# Altium PCB Buck Converter.PcbDoc
Units mil, origin at the board's own origin, x right, y up, seen from the top; angles counter-clockwise.
Board outline 1155 x 335 mil, 2 copper layers (Top Layer, Bottom Layer); 9 components, 6 nets, 22 pads, 23 vias.
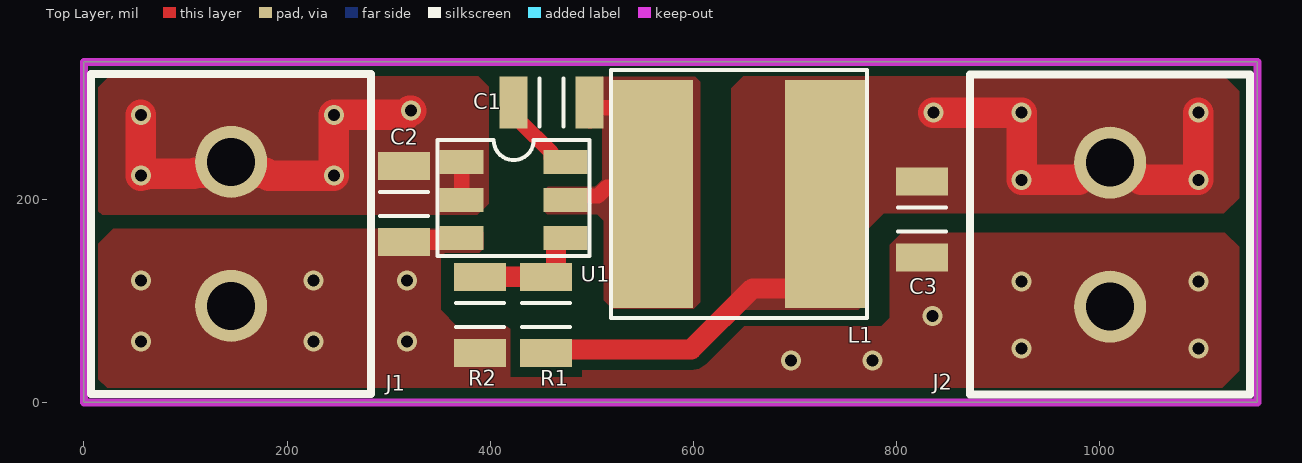
[diagram p0: Top Layer view]
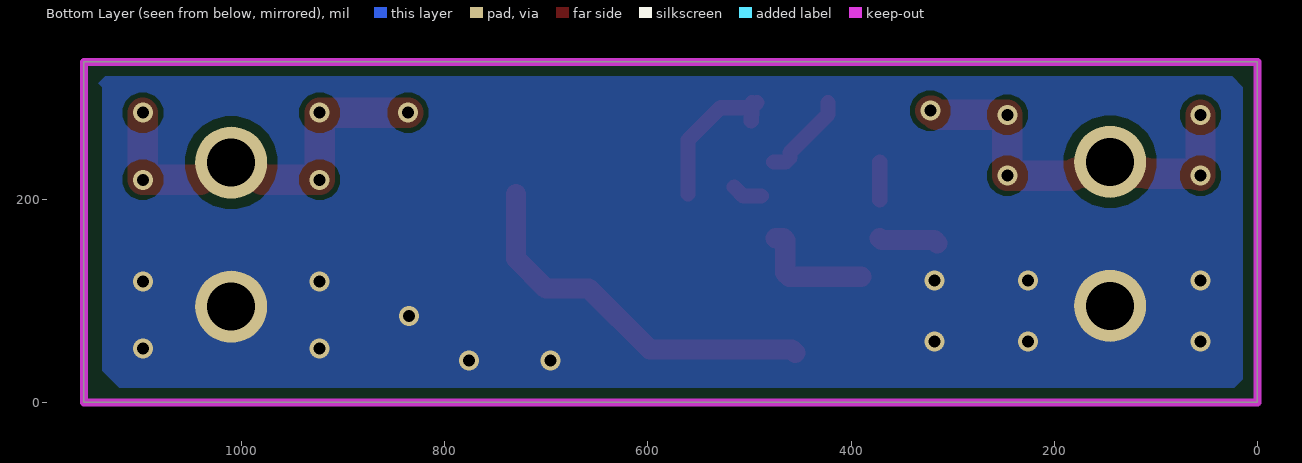
[diagram p1: Bottom Layer view, seen from below]
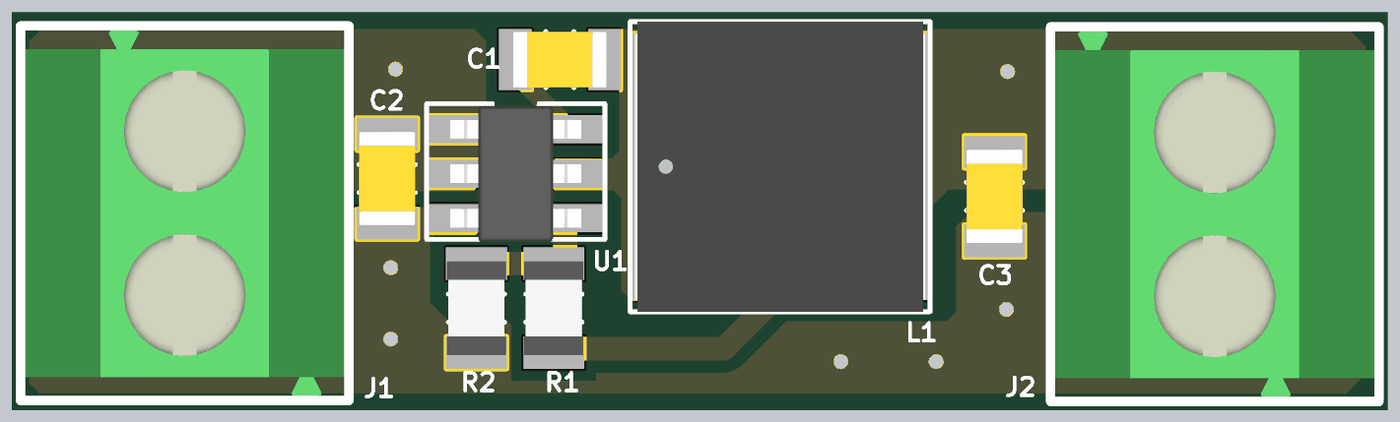
[diagram p2: 3D render of the assembled board from above, using the file's embedded part models]

## Layer stack, top to bottom
Top Solder: solder mask 0.4, Solder Resist, Dk 3.5
Top Layer: signal copper 1.4
Dielectric 1: dielectric 12.6, FR-4, Dk 4.8
Bottom Layer: signal copper 1.4
Bottom Solder: solder mask 0.4, Solder Resist, Dk 3.5

## Board outline
0,0 1155,0 1155,335 0,335

## Design rules (kind name [scope] priority, off if disabled: settings)
Clearance [All] p1: gap=10 ignorepadtopadclearanceinfootprint=FALSE except(0: Arc-Hole Track-Hole SMDPad-Hole THPad-Hole Via-Hole Fill-Hole Poly-Hole Region-Hole Text-Hole)
MinimumSolderMaskSliver [All] p1: minsoldermaskwidth=0
NetAntennae [All] p1: netantennaetolerance=1
PolygonConnect [All] p1: connectstyle=Relief reliefconductorwidth=10 reliefentries=4 polygonreliefangle="90 Angle" airgapwidth=10
RoutingVias [All] p1: holewidth=11.81 width=19.68 viastyle="Through Hole" minholewidth=9.84 minwidth=15.75 maxholewidth=19.68 maxwidth=39.37
SilkToSilkClearance [All] p1: silktosilkclearance=0
SilkToSolderMaskClearance [IsPad] p1: minsilkscreentomaskgap=0 clearancetoexposedcopper=TRUE
SolderMaskExpansion [All] p1: expansion=4 istentingtop=FALSE
Width [All] p1: maxlimit=500 minlimit=10 preferedwidth=10 minimp=50.000000 maximp=50.000000 favimp=50.000000
26 further rules are at their usual default settings.

## Components (designator, comment, footprint, x,y, rotation, side; value= is the part's Value field where it differs from the comment)
C1 "0.1uF/25V" "CAP 0805" 460,295 r180 top
C2 "2.2uF/50V" "CAP 0805" 315,195 r90 top
C3 "10uF/10V" "CAP 0805" 825,180 r90 top
J1 "Header x2" "HEADER X2" 145,165.87 r90 top
J2 "Header x2" "HEADER X2" 1010,165 r270 top
L1 "4.7uH" IND_0628 645,205 r0 top
R1 "51K" "RES 0805" 455,86 r270 top
R2 "22.1K" "RES 0805" 390,86 r90 top
U1 "LMR50410Y3FQDBVRQ1" SOT23-6 423,199 r0 top

## Footprints (in the part's own frame and the unit in brackets; to place one, negate y for a bottom-side part, rotate by r counter-clockwise, add the part's x,y. Pads: shape width x height; smd on the part's side, far side on the other; paste and mask are expansions set on the pad)
"CAP 0805" [mm]
  rect 0.7x1.3 smd mask+0.05: 1(-0.95,0) 2(0.95,0)
  silkscreen extent -0.3,-0.6 0.3,0.6, body extent -1,-0.6 1,0.6, height 1
"HEADER X2" [mm]
  round 1.8 hole 1.2 mask+0.05: 1(-1.8,0) 2(1.8,0)
  silkscreen extent -4,-3.5 4,3.5, body extent -3.9,-3.4 3.9,3.4, height 8.41
IND_0628 [mm]
  rect 2x5.7 smd mask+0.05: 1(-2.15,0) 2(2.15,0)
  silkscreen extent -3.2,-3.1 3.2,3.1, body extent -3.1,-3.1 3.1,3.1, height 2.8
"RES 0805" [mm]
  rect 0.7x1.3 smd mask+0.05: 1(-0.95,0) 2(0.95,0)
  silkscreen extent -0.3,-0.6 0.3,0.6, body extent -1,-0.63 1,0.63, height 0.44
SOT23-6 [mm]
  rect 1.1x0.6 smd mask+0.05: 1(-1.3,0.95) 2(-1.3,0) 3(-1.3,-0.95) 4(1.3,-0.95) 5(1.3,0) 6(1.3,0.95)
  silkscreen extent -1.9,-1.4 1.9,1.5, body extent -1.4,-1.45 1.4,1.45, height 1.2

## Part data
C1: library part "CAP CER 0.1uF", "0.1 µF ±20% 25V Ceramic Capacitor X7R 0805 (2012 Metric)", Manufacturer=KEMET, Manufacturer Part Number=C0805C104M3RAC7210, Supplier Part Number 1=399-C0805C104M3RAC7210CT-ND, Category="Ceramic Capacitors", Pricing 1="1=0,1, 10=0,035, 100=0,0213, 1000=0,01423, 2500=0,01239, 5000=0,01125 (USD)", RoHS=Yes, RoHS Compliant=Yes, Stock 1=27572, Supplier 1=Digikey
C2: library part "CAP CER 2.2uF", "2.2 µF ±10% 50V Ceramic Capacitor X7R 0805 (2012 Metric)", Capacitance=2.2uF, Case Code (Metric)=2012, Case Code (Imperial)=0805, Dielectric=X7R, Manufacturer=Yageo, Manufacturer Part Number=CC0805KKX7R9BB225, Max Operating Temperature=125°C, Min Operating Temperature=-55°C, Package Quantity=3000, Supplier Part Number 1=311-3420-6-ND, Tolerance=10%, Voltage Rating=50V, Case/Package=0805, Category="Ceramic Capacitors", ComponentLink1Description=http://www.mouser.com/ds/2/447/Yageo_UPY-GP_NP0_16V-to-50V_9-358835.pdf?src-supplier=Mouser, ComponentLink1URL=http://www.mouser.com/ds/2/447/Yageo_UPY-GP_NP0_16V-to-50V_9-358835.pdf?src-supplier=Mouser, ComponentLink2Description=https://datasheet.octopart.com/CC0805KKX7R9BB225-Yageo-datasheet-166511530.pdf?src-supplier=Future+Electronics, ComponentLink2URL=https://datasheet.octopart.com/CC0805KKX7R9BB225-Yageo-datasheet-166511530.pdf?src-supplier=Future+Electronics, ComponentLink3Description=http://www.yageo.com/documents/recent/UPY-GPHC_X7R_6.3V-to-50V_18.pdf?src-supplier=Digikey, ComponentLink3URL=http://www.yageo.com/documents/recent/UPY-GPHC_X7R_6.3V-to-50V_18.pdf?src-supplier=Digikey, ComponentLink4Description=https://datasheet.octopart.com/CC0805KKX7R9BB225-Yageo-datasheet-151948686.pdf?src-supplier=Farnell, ComponentLink4URL=https://datasheet.octopart.com/CC0805KKX7R9BB225-Yageo-datasheet-151948686.pdf?src-supplier=Farnell, Halogen Free="Halogen Free", Height=950um, Lead Free="Lead Free", Length=0.079inch, Material=4241ConductorMaterial, Mount="Surface Mount", Packaging="Tape and Reel", Pricing 1="1=0,33, 10=0,217, 100=0,1313, 1000=0,1036 (USD)", RoHS=Yes, RoHS Compliant=Yes, Series=CC, Stock 1=152900, Supplier 1=Digikey, Termination=SMD/SMT, Thickness=0.057inch, Voltage Rating (DC)=50V, Weight=0.000194oz, Width=0.049inch
C3: library part "CAP CER 10uF", "10 µF ±10% 10V Ceramic Capacitor X7R 0805 (2012 Metric)", Capacitance=10uF, Case Code (Metric)=2012, Case Code (Imperial)=0805, Dielectric=X7R, Manufacturer=Murata, Manufacturer Part Number=GRM21BR71A106KA73L, Max Operating Temperature=125°C, Min Operating Temperature=-55°C, Package Quantity=3000, Supplier Part Number 1=490-10516-1-ND, Tolerance=10%, Voltage Rating=10V, Case/Package=0805, Category="Ceramic Capacitors", Height=1.25mm, Length=0.079inch, Material=4241ConductorMaterial, Mount="Surface Mount", Number of Pins=2NUMBER, Packaging="Tape and Reel", Pricing 1="1=0,13, 10=0,081, 100=0,0518, 1000=0,03306 (USD)", Reach SVHC Compliant=No, RoHS=Yes, RoHS Compliant=Yes, Series=GRM, Stock 1=594213, Supplier 1=Digikey, Termination=SMD/SMT, Thickness=0.055inch, Voltage Rating (DC)=10V, Weight=0.000335oz, Width=0.049inch
L1: library part "IND 4.7uH", "Inductor Power Shielded/Molded Wirewound 4.7uH 20% 100KHz Ferrite 3A 0.031Ohm DCR 2424 T/R", Manufacturer=Abracon, Manufacturer Part Number=ASPI-0628-4R7M-T1, Supplier Part Number 1=535-12806-1-ND, Category="Fixed Inductors", ComponentLink1Description=http://www.abracon.com/Support/PackageDrawing/Magnetics/ASPI-0628.PDF?src-supplier=Digikey, ComponentLink1URL=http://www.abracon.com/Support/PackageDrawing/Magnetics/ASPI-0628.PDF?src-supplier=Digikey, ComponentLink2Description=https://abracon.com/Magnetics/new/ASPI-0628.pdf?src-supplier=Digikey, ComponentLink2URL=https://abracon.com/Magnetics/new/ASPI-0628.pdf?src-supplier=Digikey, ComponentLink3Description=https://datasheet.octopart.com/ASPI-0628-4R7M-T1-Abracon-datasheet-141160310.pdf?src-supplier=Sager+Electronics, ComponentLink3URL=https://datasheet.octopart.com/ASPI-0628-4R7M-T1-Abracon-datasheet-141160310.pdf?src-supplier=Sager+Electronics, Pricing 1="1=0,33, 10=0,275, 100=0,2202 (USD)", RoHS=Yes, Stock 1=827, Supplier 1=Digikey
R1: library part "RES 51 KOHM", "51 kOhms ±1% 0.125W, 1/8W Chip Resistor 0805 (2012 Metric) Moisture Resistant Thick Film", Case Code (Metric)=2012, Case Code (Imperial)=0805, Manufacturer=Yageo, Manufacturer Part Number=RC0805FR-0751KL, Max Operating Temperature=155°C, Max Power Dissipation=125mW, Min Operating Temperature=-55°C, Package Quantity=1, Resistance=51kR, Supplier Part Number 1=311-51.0KCRCT-ND, Temperature Coefficient=100ppm/°C, Tolerance=1%, Voltage Rating=150V, Case/Package=0805, Category="Chip SMD Resistors", ComponentLink1Description=https://datasheet.ciiva.com/11808/0900766b8106beab-11808330.pdf?src-supplier=Rs, ComponentLink1URL=https://datasheet.ciiva.com/11808/0900766b8106beab-11808330.pdf?src-supplier=Rs, ComponentLink2Description=https://datasheet.ciiva.com/2457/pyu-r-int-thick-7-2457012.pdf?src-supplier=Digikey, ComponentLink2URL=https://datasheet.ciiva.com/2457/pyu-r-int-thick-7-2457012.pdf?src-supplier=Digikey, ComponentLink3Description=https://datasheet.ciiva.com/2457/pyu-r-int-thick-7-2457013.pdf?src-supplier=Digikey, ComponentLink3URL=https://datasheet.ciiva.com/2457/pyu-r-int-thick-7-2457013.pdf?src-supplier=Digikey, ComponentLink4Description=https://datasheet.ciiva.com/2457/pyu-r-int-thick-7-2457011.pdf?src-supplier=Digikey, ComponentLink4URL=https://datasheet.ciiva.com/2457/pyu-r-int-thick-7-2457011.pdf?src-supplier=Digikey, ComponentLink5Description=https://datasheet.ciiva.com/5596/rc0805-5596026.pdf?src-supplier=Mouser, ComponentLink5URL=https://datasheet.ciiva.com/5596/rc0805-5596026.pdf?src-supplier=Mouser, ComponentLink6Description=https://datasheet.ciiva.com/15189/getdatasheetpartid-323948-15189990.pdf?src-supplier=Verical, ComponentLink6URL=https://datasheet.ciiva.com/15189/getdatasheetpartid-323948-15189990.pdf?src-supplier=Verical, ComponentLink7Description=https://datasheet.ciiva.com/16746/rc0805-16746823.pdf?src-supplier=Future+Electronics, ComponentLink7URL=https://datasheet.ciiva.com/16746/rc0805-16746823.pdf?src-supplier=Future+Electronics, Construction=Rectangular, Depth=1.25mm, Features="Moisture Resistant", Height=0.024inch, Lead Free="Lead Free", Length=0.079inch, Military Standard=Not, Mount="Surface Mount", Number of Terminations=2, Packaging="Tape and Reel", Power Rating=125mW, Pricing 1="1=0,1, 10=0,014, 100=0,0092, 1000=0,00714 (USD)", RoHS=Yes, RoHS Compliant=Yes, Series=RC, Size Code=0805, Stock 1=127291, Supplier 1=Digikey, Technology="THICK FILM", Termination=SMD/SMT, Voltage Rating (DC)=150V, Width=0.049inch
R2: library part "RES 22.1 KOHM", "SMD Chip Resistor, 22.1 kOhm, ± 1%, 125 mW, 0805 [2012 Metric], Thick Film, General Purpose", Manufacturer=Yageo, Manufacturer Part Number=RC0805FR-0722K1L, Supplier Part Number 1=311-22.1KCRCT-ND, Voltage Rating (DC)=150V, Category="Chip SMD Resistors", ComponentLink1Description=https://datasheet.ciiva.com/12557/rc0805-257173-12557879.pdf?src-supplier=Mouser, ComponentLink1URL=https://datasheet.ciiva.com/12557/rc0805-257173-12557879.pdf?src-supplier=Mouser, ComponentLink2Description=https://datasheet.ciiva.com/2519/pyu-r-int-thick-7-2519759.pdf?src-supplier=Digikey, ComponentLink2URL=https://datasheet.ciiva.com/2519/pyu-r-int-thick-7-2519759.pdf?src-supplier=Digikey, ComponentLink3Description=https://datasheet.ciiva.com/2519/pyu-r-int-thick-7-2519760.pdf?src-supplier=Digikey, ComponentLink3URL=https://datasheet.ciiva.com/2519/pyu-r-int-thick-7-2519760.pdf?src-supplier=Digikey, ComponentLink4Description=https://datasheet.ciiva.com/2519/pyu-r-int-thick-7-2519761.pdf?src-supplier=Digikey, ComponentLink4URL=https://datasheet.ciiva.com/2519/pyu-r-int-thick-7-2519761.pdf?src-supplier=Digikey, Lead Free=5697LeadFree, Pricing 1="1=0,1, 10=0,014, 100=0,0092, 1000=0,00714 (USD)", RoHS=Yes, Stock 1=60840, Supplier 1=Digikey
U1: "Switching Regulator, Current-mode, 1A, 2100kHz Switching Freq-Max, PDSO6", Manufacturer="Texas Instruments", Supplier Part Number 1=296-LMR50410Y3FQDBVRQ1CT-ND, Category="Voltage Regulators - Switching", Manufacturer Part Number=LMR50410Y3FQDBVRQ1, Pricing 1="1=1,47, 10=1,074, 25=0,974, 100=0,8645, 250=0,81228, 500=0,78078, 1000=0,75486 (USD)", RoHS=Yes, Stock 1=7505, Supplier 1=Digikey

## Via types
v1: diameter 19.68, hole 11.81, Top Layer to Bottom Layer, 23 vias

## Nets (pads, with @x,y where several pads share a name; then routed paths per layer and width w, separated by ;. In a path a pad name is that pad's centre, name@x,y a point inside that pad or via, vN(x,y) a via of type N, cw(c..) or ccw(c..) an arc to the next point about the centre after c; other vN are vias at no path point)
+3V3: C3.2 J2.1 L1.2 R1.2 | length 769.9
  Top Layer w20: R1.2 458.4,52 598,52 657.99,111.99 700.28,111.99 729.65,141.36 L1.2
  Top Layer w30: v1(836,285) v1(923,285) v1(923,219) 979.37,219 996.24,235.87 J2.1 ; J2.1@1023.76,235.87 1040.63,219 v1(1097,219) v1(1097,285)
+12V: C2.2 J1.2 U1.1 U1.2 | length 436.4
  Top Layer w15: U1.2 U1.1
  Top Layer w30: v1(56,283) v1(56,223) 56.9,223.9 60.21,223.9 61.31,225 108.28,225 109.32,226.04 134.31,226.04 J1.2 155.69,226.04 178.68,226.04 181.72,223 v1(246,223) v1(246,283) 316.73,283 320.73,287 v1(322,287)
GND: C2.1 C3.1 J1.1 J2.2 R2.1 U1.3 | length 58.9
  Top Layer w20: C2.1@315,156.6 318.19,159.79 370.01,159.79 U1.3
  other v1: 696,41 776,41 923,53 1097,53 56,60 226,60 318,60 835,85 923,119 1097,119 56,120 226,120 318,120
NetC1_1: C1.1 L1.1 U1.5 | length 185.2
  Top Layer w15: U1.5@488.06,203.03 506.1,203.03 514.89,211.82 ; C1.1@492.4,295 497.4,290 528.48,290 560.35,258.13 L1.1 ; C1.1 497.4,283.19 498.07,282.52 C1.1@498.07,276.91
NetC1_2: C1.2 U1.6 | length 87.7
  Top Layer w15: C1.2 422.6,283.19 428.88,276.91 460.03,245.76 460.03,240.71 464.34,236.4 U1.6@476.18,236.4
NetR1_1: R1.1 R2.2 U1.4 | length 119.1
  Top Layer w20: R2.2 R1.1 460.81,123.4 464.59,127.18 464.59,159.79 466.4,161.6 U1.4

## Polygon pours and split planes (outlines as drawn)
+12V on Top Layer "L2-No Net" (solid, remove dead copper, pour order 20): 25.36,321.41 387.36,321.41 398.36,310.41 398.36,195.41 387.36,184.41 17.36,184.41 10.36,191.41 10.36,306.41
+3V3 on Top Layer "L2-No Net" (solid, remove dead copper, pour order 19): 650,322 1121,322 1137,306 1137,201 1122,186 787,186 772,171 772,101 762,91 647,91 637,101 637,309
NetC1_1 on Top Layer "L2-No Net" (solid, remove dead copper, pour order 15): 601.56,320.56 606.56,315.56 606.56,98.56 600,92 520.12,92 511.56,100.56 511.56,178.44 505,185 456.01,185 453.12,187.86 452.89,208.87 455.99,212 503,212 510,219 510,320.56
GND on Top Layer "L2-No Net" (solid, remove dead copper, pour order 17): 27.02,9.98 14,23 14,156 29,171 393,171 393,151 389,147 355,147 351,143 351,91 367,75 785,75 793,83 793,155 805,167 1123,167 1137,153 1137,31 1117,11
GND on Bottom Layer "L2-No Net" (solid, remove dead copper, pour order 18): 14,310 26,322 1133,322 1141,314 1137,310 1137,31 1120,14 23,14 14,23

## Keep-outs
Keep-Out Layer:
  the board outline again, w7.87